# Altium PCB AICat V1.2.PcbDoc (part 1 of 2)
Units mil, origin at the board's own origin, x right, y up, seen from the top; angles counter-clockwise.
Board outline 6000 x 4000 mil, 2 copper layers (Top Layer, Bottom Layer); 86 components, 79 nets, 277 pads, 197 vias.
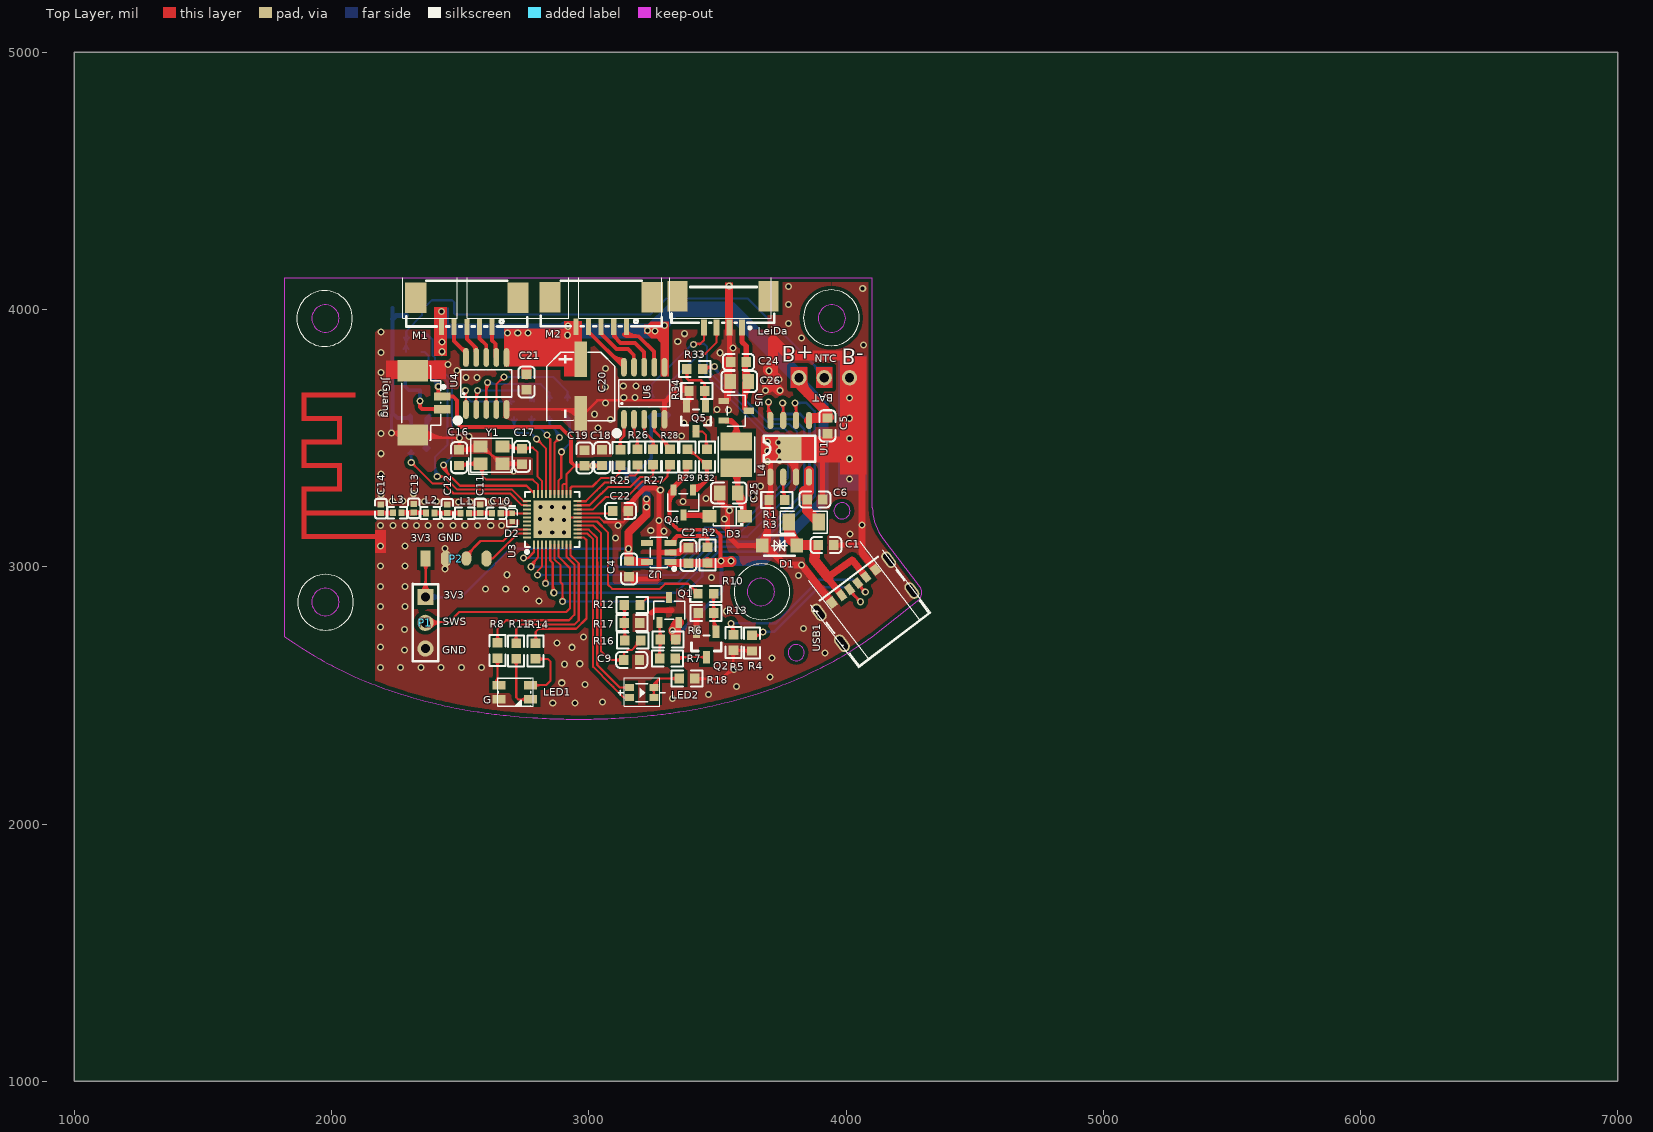
[diagram p0: Top Layer view]
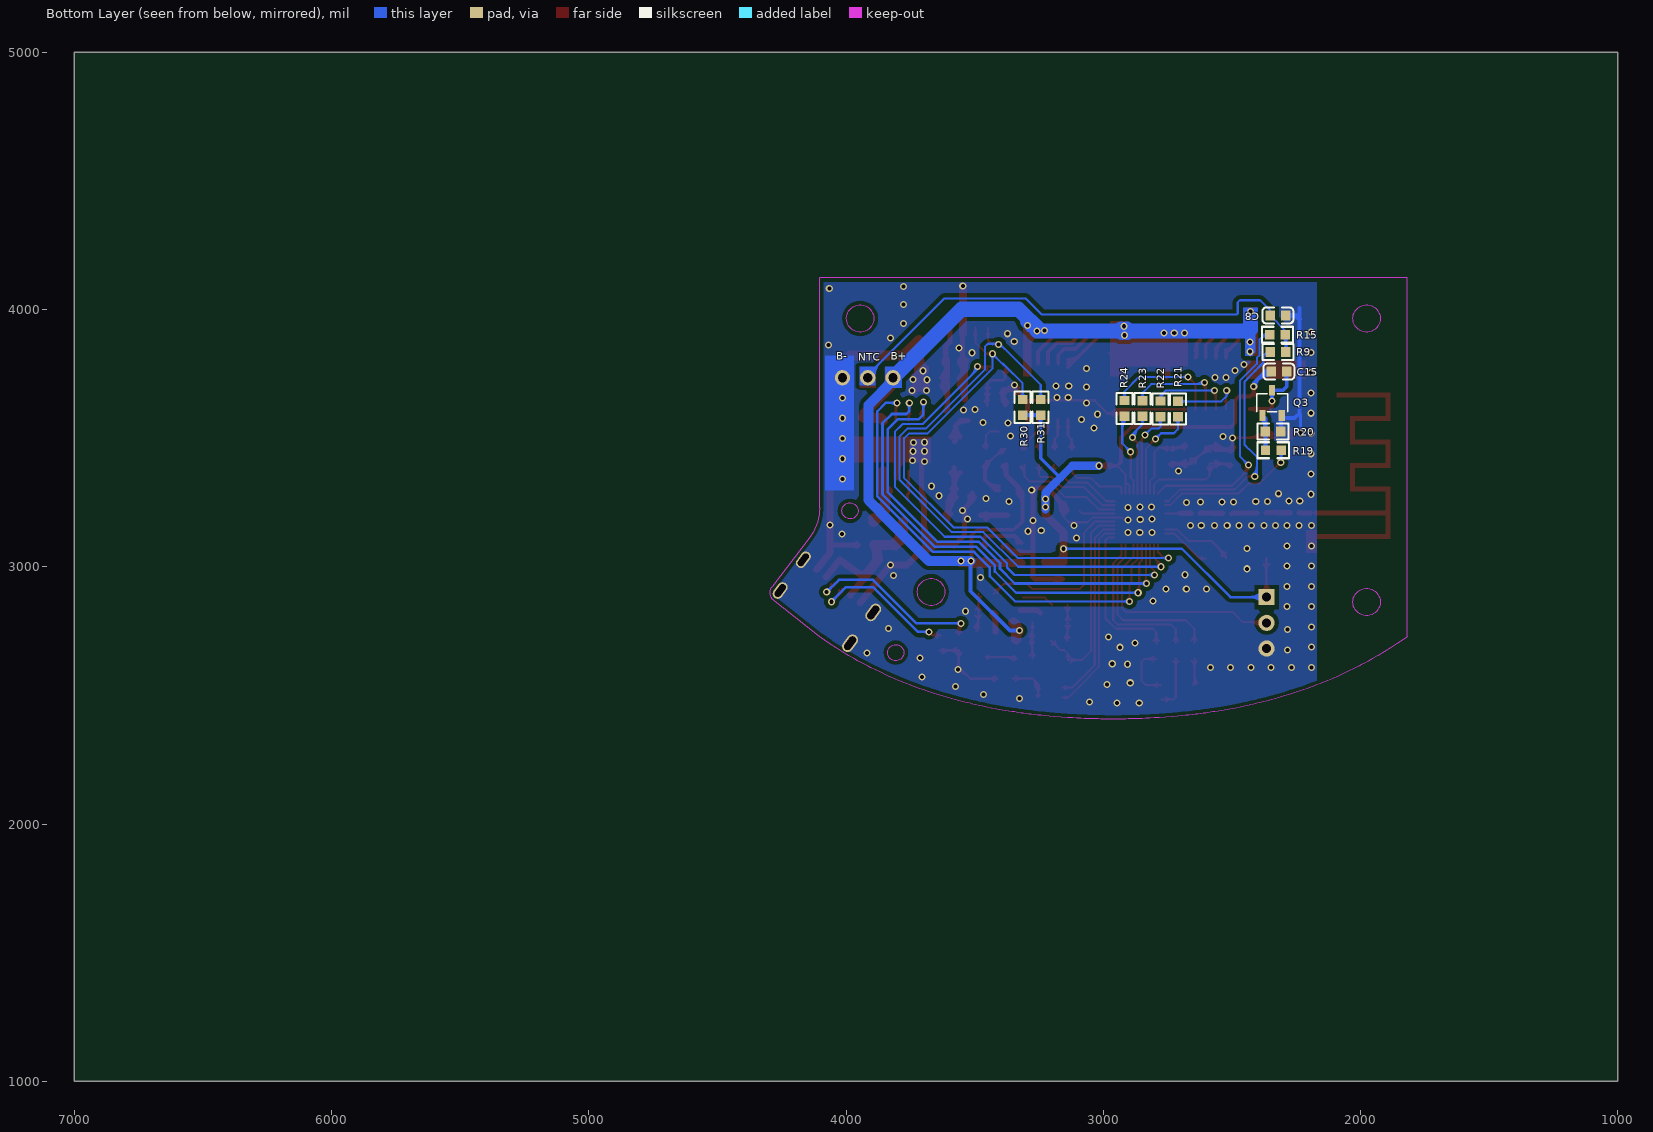
[diagram p1: Bottom Layer view, seen from below]
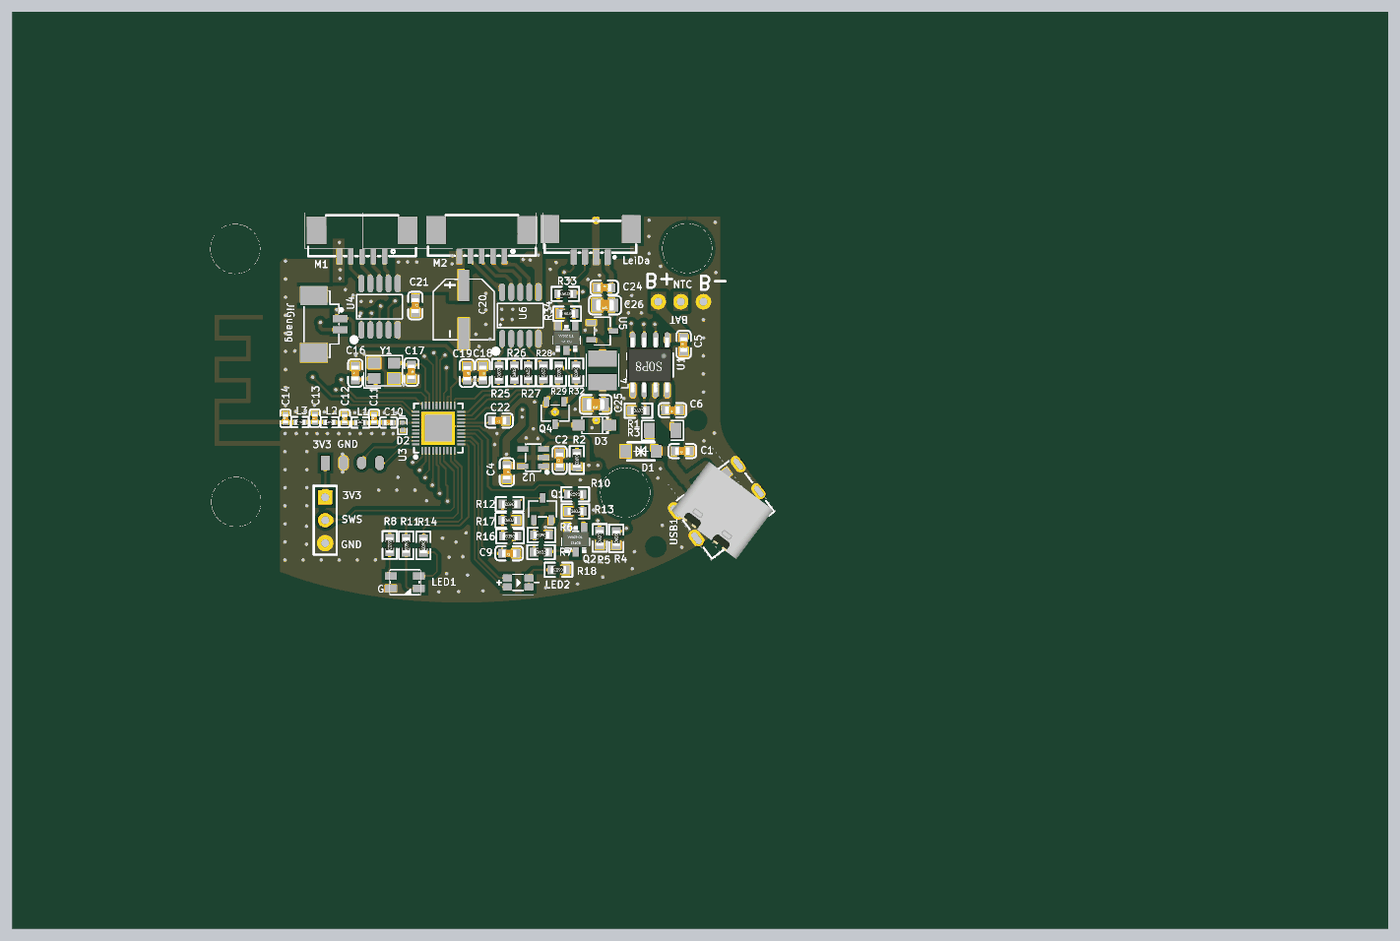
[diagram p3: 3D render of the assembled board from above, using the file's embedded part models]
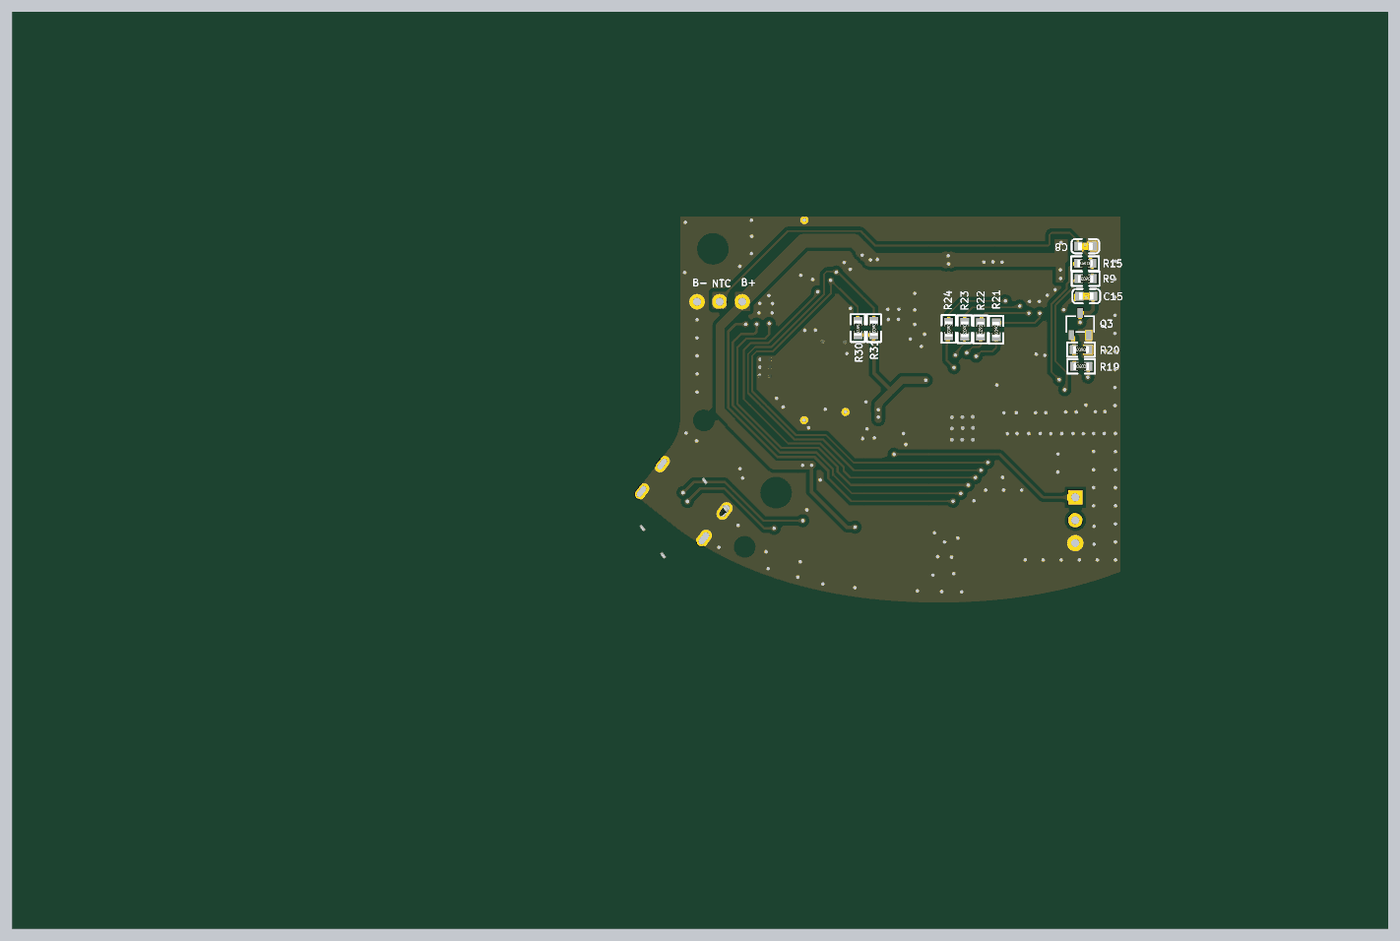
[diagram p4: 3D render of the assembled board from below, using the file's embedded part models]

## Layer stack, top to bottom
Top Layer: signal copper 1.4
Dielectric: dielectric 12.6, FR-4, Dk 4.8
Bottom Layer: signal copper 1.4

## Board outline
1000,1000 7000,1000 7000,5000 1000,5000

## Design rules (kind name [scope] priority, off if disabled: settings)
Clearance [All] p1: gap=7
ComponentClearance [All] p1: gap=0 collisioncheckmode=3 verticalgap=0 showdistances=FALSE
HoleToHoleClearance [All] p1: gap=4 allowstackedmicrovias=TRUE
MinimumSolderMaskSliver [All] p1: minsoldermaskwidth=2
PolygonConnect [All] p1: connectstyle=Direct reliefconductorwidth=10 reliefentries=4 polygonreliefangle="90 Angle"
RoutingVias [All] p1: holewidth=28 width=50 viastyle="Through Hole" minholewidth=28 minwidth=50 maxholewidth=28 maxwidth=50
SilkToSilkClearance [All] p1: silktosilkclearance=2
SilkscreenOverComponentPads [All] p1: minsilkscreentomaskgap=0
SolderMaskExpansion [All] p1: expansion=4
TestPointUsage [All] p1: valid=0 allowmultiple=FALSE
Testpoint [All] p1: side=15 testpointundercomponent=TRUE minsize=40 maxsize=100 preferedsize=60 minholesize=0 maxholesize=40 preferedholesize=32 testpointgrid=1 style=1023 order=0123456789
Width [All] p1: maxlimit=100 minlimit=8 preferedwidth=10 minimp=50.000000 maximp=50.000000 favimp=50.000000
19 further rules are at their usual default settings.

## Components (designator, comment, footprint, x,y, rotation, side; value= is the part's Value field where it differs from the comment)
BAT "BX-PH2.0-3PWT" HDR-TH_3P-P2.50_ZX-XH2.54-3PWZ 3943,3898 r180 top (schematic designator BAT1)
C1 "0.1uF" 0603_C 3922,3084 r180 top
C2 "1uf" 0603_C 3387,3044 r270 top
C4 "10uF" 0603_C 3157,2992 r90 top
C5 "10uf" 0603_C 3928,3548 r270 top
C6 "10UF" 0603_c 3879,3262 r180 top
C8 "100nF" 0603_C 2321,3977 r180 bottom
C9 "100nF" 0603_C 3167,2638 r180 top
C10 "220pF" 0402_c 2641,3208 r180 top
C11 "NC" 0402_C 2578,3226 r270 top
C12 "NC" 0402_C 2450,3225 r270 top
C13 "NC" 0402_C 2320,3227 r270 top
C14 "NC" 0402_C 2192,3226 r270 top
C15 "0.1uf/25v" 0603_C 2317,3759 r0 bottom
C16 "12PF" 0603_c 2496,3424 r270 top
C17 "12PF" 0603_c 2741,3429 r90 top
C18 "1UF" 0603_c 3052,3424 r90 top
C19 "1UF" 0603_c 2983,3423 r90 top
C20 "220uF/10V" "SMD 6.3*5.4 电解" 2968,3695 r270 top
C21 "100nf" 0603_C 2758,3718 r90 top
C22 "1UF" 0603_c 3123,3217 r180 top
C24 "0.1uF" 0603_C 3582,3796 r0 top
C25 "22uf-16v" 0805_c 3544,3287 r180 top
C26 "22uf-16v" 0805_c 3585,3720 r180 top
D1 "SMF5.0CA_C726939" "SOD-123 双向" 3748,3080 r0 top
D2 "SE6V3LHN102T 6.3v单向" 0402-D 2707,3189 r270 top
D3 "DSK24" SOD-123FL 3532,3190 r180 top
JiGuang "JiGuang" CONN-SMD_2P-P1.25-LT 2373,3637 r270 top (schematic designator CN1)
L1 "0R" 0402_R 2518,3208 r180 top
L2 "0R" 0402_R 2384,3209 r180 top
L3 "0R" 0402_R 2255,3210 r180 top
L4 "47uH" IND-SMD_L3.5-W3.0_CD31 3574,3436 r90 top
LED1 "XL-A3528RGBC-BM" LED-ARRAY-SMD_4P-L3.2-W2.8-LS3.5-BL_XL-A3528RGBC-BM 2712,2512 r0 top
LED2 "*" LED-SMD_4P-L3.2-W1.6-TL_XL-3216SURUGC 3206,2511 r0 top
LeiDa "HC-1.25-4PLT" CONN-SMD_4P-P1.25_LT 3522,3991 r180 top (schematic designator CN2)
M1 "MOTORA" CONN-SMD_1.25-5PLT 2526,3989 r180 top (schematic designator J1)
M2 "MOTORB" CONN-SMD_1.25-5PLT 3048,3990 r180 top (schematic designator J2)
P1 "DEBUG" SIP4-2.54#1 2365,2982 r270 top (schematic designator P2)
P2 "UART" SIP4-2.54#2 2366,3032 r0 top
Q1 "SI2301 P" SOT-23 3321,2811 r270 top
Q2 "S8050" SOT-23(SOT-23-3) 3457,2698 r90 top
Q3 "AO3400" SOT-23 2335,3617 r270 bottom
Q4 "SI2301 P" SOT-23 3359,3270 r90 top
Q5 "S8050" SOT-23(SOT-23-3) 3417,3576 r90 top
R1 "1.3k" 0603_R 3731,3260 r0 top
R2 "10k" 0603_R 3462,3045 r90 top
R3 "R250" 1206_R 3830,3172 r180 top
R4 "5.1K" 0603_R 3634,2703 r270 top
R5 "5.1K" 0603_R 3562,2705 r270 top
R6 "560K" 0603_R 3308,2718 r180 top
R7 "1K" 0603_R 3306,2643 r0 top
R8 "1k" 0603_R 2646,2674 r90 top
R9 "10k" 0603_R 2320,3835 r0 bottom
R10 "1K" 0603_r 3455,2895 r180 top
R11 "1k" 0603_R 2718,2673 r90 top
R12 "560K" 0603_R 3169,2852 r180 top
R13 "10K" 0603_r 3456,2821 r0 top
R14 "1k" 0603_R 2793,2672 r90 top
R15 "100R" 0603_R 2322,3902 r180 bottom
R16 "1K" 0603_R 3171,2713 r180 top
R17 "100K" 0603_R 3168,2782 r0 top
R18 "1K" 0603_R 3382,2566 r180 top
R19 "330R" 0603_R 2339,3453 r180 bottom
R20 "10K" 0603_R 2340,3526 r0 bottom
R21 "330R" 0603_R 2710,3613 r270 bottom
R22 "330R" 0603_R 2778,3614 r270 bottom
R23 "330R" 0603_R 2847,3615 r270 bottom
R24 "330R" 0603_R 2917,3616 r270 bottom
R25 "330R" 0603_R 3123,3425 r270 top
R26 "330R" 0603_R 3190,3426 r270 top
R27 "330R" 0603_R 3250,3427 r270 top
R28 "330R" 0603_R 3316,3427 r270 top
R29 "560K" 0603_R 3384,3427 r90 top
R30 "10K" 0603_R 3313,3620 r270 bottom
R31 "10K" 0603_R 3243,3620 r270 bottom
R32 "1K" 0603_R 3459,3427 r90 top
R33 "1K" 0603_r 3412,3769 r0 top
R34 "10K" 0603_r 3420,3683 r0 top
U1 "TP4056X" SOP8-9 3781,3459 r0 top
U2 "SSP7615" SOT-23-5 3265,3038 r180 top
U3 "TLSR8208C" QFN-40_L5.0-W5.0-P0.40-BL-EP3.7 2860,3181 r0 top
U4 "ULN2802" ESSOP-10 2607,3705 r0 top
U5 "HE9116A50NR" SOT-23 3553,3598 r180 top
U6 "ULN2802" ESSOP-10 3221,3667 r0 top
USB1 "TYPE-C 6P" TPYE-C-6 4075,2865 r127 top
Y1 "24MHz +-20PPM" CRYSTAL-SMD_4P-L3.2-W2.5 2633,3432 r0 top

## Footprints (in the part's own frame and the unit in brackets; to place one, negate y for a bottom-side part, rotate by r counter-clockwise, add the part's x,y. Pads: shape width x height; smd on the part's side, far side on the other; paste and mask are expansions set on the pad)
0402-D [mil]
  rect 19.89x21.68 smd paste-3937.01 mask+2: 1(-19.05,-5.15) 2(13.75,-5.15)
  silkscreen extent -50,-25 33,15
0402_c [mm]
  rect 0.6x0.65 smd: 1(-0.425,0) 2(0.425,0)
  silkscreen extent -0.98,-0.58 0.98,0.58, body extent -0.48,-0.3 0.52,0.3, height 0.2
0402_C [mm]
  rect 0.6x0.65 smd: 1(-0.425,0) 2(0.425,0)
  silkscreen extent -0.98,-0.58 0.98,0.58, body extent -0.48,-0.3 0.52,0.3, height 0.2
0402_R [mm]
  rect 0.6x0.65 smd: 1(-0.425,0) 2(0.425,0)
  silkscreen extent -0.97,-0.58 0.97,0.58, body extent -0.57,-0.27 0.58,0.28, height 0.41
0603_C [mm]
  rect 0.93x0.98 smd: 1(-0.77,0) 2(0.77,0)
  silkscreen extent -1.54,-0.79 1.54,0.79, body extent -0.8,-0.4 0.8,0.4, height 0.3
0603_c [mm]
  rect 0.93x0.98 smd: 1(-0.77,0) 2(0.77,0)
  silkscreen extent -1.54,-0.79 1.54,0.79, body extent -0.8,-0.4 0.8,0.4, height 0.3
0603_R [mm]
  rect 0.93x0.98 smd: 1(-0.77,0) 2(0.77,0)
  silkscreen extent -1.53,-0.79 1.54,0.79, body extent -0.85,-0.4 0.85,0.4, height 0.56
0603_r [mm]
  rect 0.93x0.98 smd: 1(-0.77,0) 2(0.77,0)
  silkscreen extent -1.53,-0.79 1.54,0.79, body extent -0.85,-0.4 0.85,0.4, height 0.56
0805_c [mm]
  rect 1.16x1.47 smd: 1(-0.89,0) 2(0.89,0)
  silkscreen extent -1.77,-1.04 1.77,1.04, body extent -1,-0.62 1,0.63, height 0.77
1206_R [mil]
  rect 47.54x66.97 smd: 1(-64.23,-1.52) 2(52.21,-1.52)
  silkscreen extent -97,-44 85,41
CONN-SMD_1.25-5PLT [mm]
  rect 0.5x1.6 smd paste+0.051: 1(-2.5,1.45) 2(-1.25,1.45) 3(0,1.45) 4(1.25,1.45) 5(2.5,1.45)
  rect 2.1x3 smd paste+0.051: 6(-5.05,-1.45) 7(5.05,-1.45)
  silkscreen extent -5.97,-3.12 5.97,1.4
CONN-SMD_2P-P1.25-LT [mm]
  rect 0.8x1.6 smd paste+0 mask+0.05: 1(-0.625,1.45) 2(0.625,1.45)
  rect 2.1x3 smd paste+0 mask+0.05: 3(-3.175,-1.45) 4(3.175,-1.45)
  silkscreen extent -3.68,-2.55 3.68,1.73
CONN-SMD_4P-P1.25_LT [mm]
  rect 0.6x1.6 smd paste+0.051: 1(-1.875,1.55) 2(-0.625,1.55) 3(0.625,1.55) 4(1.875,1.55)
  rect 2x3 smd paste+0.051: 5(-4.5,-1.55) 6(4.5,-1.55)
  silkscreen extent -5.06,-2.45 5.09,1.7
CRYSTAL-SMD_4P-L3.2-W2.5 [mm]
  rect 1.4x1.2 smd: 1(-1.383,-0.797) 2(0.817,-0.797) 3(0.817,0.903) 4(-1.383,0.903)
  silkscreen extent -2.54,-1.85 1.75,1.73
ESSOP-10 [mm]
  oval 0.56x1.855 smd paste+0.051: 1(-2.141,-2.375) 2(-1.141,-2.375) 3(-0.141,-2.375) 4(0.859,-2.375) 5(1.859,-2.375) 6(1.859,2.765) 7(0.859,2.765) 8(-0.141,2.765) 9(-1.141,2.765) 10(-2.141,2.765)
  silkscreen extent -2.67,-1.14 2.39,1.53
HDR-TH_3P-P2.50_ZX-XH2.54-3PWZ [mm]
  round 1.5 hole 0.9: 1(-1.801,4.145) 2(0.699,4.145) 3(3.199,4.145)
IND-SMD_L3.5-W3.0_CD31 [mm]
  rect 1.8x3.12 smd: 1(-1.303,0) 2(1.303,0)
  silkscreen extent -1.75,-1.8 1.75,1.8
LED-ARRAY-SMD_4P-L3.2-W2.8-LS3.5-BL_XL-A3528RGBC-BM [mm]
  rect 1.3x0.82 smd paste+0 mask+0.05: 1(-1.55,-0.7) 2(-1.55,0.7) 3(1.55,-0.7) 4(1.55,0.7)
  silkscreen extent -1.6,-1.4 1.6,1.4
LED-SMD_4P-L3.2-W1.6-TL_XL-3216SURUGC [mm]
  rect 0.9x0.7 smd paste+0.051: 1(-1.2,0.5) 2(1.2,0.5) 3(-1.2,-0.5) 4(1.2,-0.5)
  silkscreen extent -2.33,-0.89 2.3,0.89
QFN-40_L5.0-W5.0-P0.40-BL-EP3.7 [mm]
  rect 0.2x0.8 smd paste-100 mask+0.05: 1(-1.847,-2.425) 2(-1.447,-2.425) 3(-1.047,-2.425) 4(-0.647,-2.425) 5(-0.247,-2.425) 6(0.153,-2.425) 7(0.553,-2.425) 8(0.953,-2.425) 9(1.353,-2.425) 10(1.753,-2.425) 21(1.753,2.573) 22(1.353,2.573) 23(0.953,2.573) 24(0.553,2.573) 25(0.153,2.573) 26(-0.247,2.573) 27(-0.647,2.573) 28(-1.047,2.573) 29(-1.447,2.573) 30(-1.847,2.573)
  rect 0.8x0.2 smd paste-100 mask+0.05: 11(2.452,-1.726) 12(2.452,-1.326) 13(2.452,-0.926) 14(2.452,-0.526) 15(2.452,-0.126) 16(2.452,0.274) 17(2.452,0.674) 18(2.452,1.074) 19(2.452,1.474) 20(2.452,1.874) 31(-2.546,1.874) 32(-2.546,1.474) 33(-2.546,1.074) 34(-2.546,0.674) 35(-2.546,0.274) 36(-2.546,-0.126) 37(-2.546,-0.526) 38(-2.546,-0.926) 39(-2.546,-1.326) 40(-2.546,-1.726)
  rect 3.7x3.7 smd paste-100 mask+0.05: 41(-0.047,0.074)
  silkscreen extent -2.75,-3.28 2.65,2.77
SIP4-2.54#1 [mm]
  rect 1.6x1.6 hole 0.9: 2(2.54,0)
  round 1.6 hole 0.9: 3(5.08,0) 4(7.62,0)
  silkscreen extent 1.24,-1.27 8.89,1.27
SIP4-2.54#2 [mm]
  rect 1x1.6 smd: 1(0,0)
  oval 1x1.6 smd: 2(2,0) 4(6,0)
  oval 1x1.4 smd: 3(4,0)
"SMD 6.3*5.4 电解" [mm]
  rect 3.5x1.2 smd: 1(-2.822,0.023) 2(2.518,0.023)
  silkscreen extent -3.53,-3.35 3.22,3.4
"SOD-123 双向" [mm]
  rect 1.2x1.4 smd: 1(-1.864,0.06) 2(1.536,0.06)
  silkscreen extent -1.66,-0.94 1.34,1.06
SOD-123FL [mm]
  rect 1.4x1.2 smd: 1(1.579,-0.166) 2(-1.891,-0.166)
  silkscreen extent -1.76,-1.17 1.22,0.84
SOP8-9 [mil]
  oval 24x66.93 smd: 1(-75,-110) 2(-25,-110) 3(25,-110) 4(75,-110) 5(75,110) 6(25,110) 7(-25,110) 8(-75,110)
  rect 90.55x90.55 smd: 9(0,0)
  silkscreen extent -100,-50 100,50, body extent -100,-119 98,119, height 63
SOT-23 [mm]
  rect 1.07x0.6 smd: 1(0.719,-1.166) 2(0.719,0.734) 3(-1.751,-0.216)
  silkscreen extent -1.39,-1.75 0.36,1.32
SOT-23(SOT-23-3) [mm]
  rect 1.25x0.7 smd: 1(1.25,-0.95) 2(1.25,0.95) 3(-1.25,0)
  silkscreen extent -0.65,-1.46 0.9,1.46, body extent -1.5,-1.5 1.5,1.5, height 1.3
SOT-23-5 [mm]
  rect 1.2x0.6 smd paste+0 mask+0.05: 1(-1.325,0.51) 2(-1.325,-0.44) 3(-1.325,-1.39) 4(0.975,-1.39) 5(0.975,0.51)
  silkscreen extent -1.85,-1.94 0.67,1.32
TPYE-C-6 [mm]
  oval 1.9x1.1 hole 0.7 slot 1.5 at 0 deg: 7(-1.9,4.32) 7(1.9,4.32)
  oval 1.8x1 hole 0.6 slot 1.4 at 0 deg: 7(-1.9,-4.32) 7(1.9,-4.32)
  rect 1x0.7 smd: A5(1.9,0.5) A9(1.9,-1.5) B5(1.9,-0.5) B9(1.9,1.5)
  rect 1x0.8 smd: A12(1.9,-2.7) B12(1.9,2.7)
  silkscreen extent -4.7,-4.32 2.79,4.65, body extent -4.55,-4.45 2.25,4.49, height 3.41

## Part data
C1 C4 C5 C15 C24: library part Cap, "Capacitor"
C2 C21 C25 C26: library part Cap1, "无极电容"
C6 C8 C9 C18 C19 C22: library part CAP
C10 C11 C12 C13 C14 C16 C17: library part CAP, "Capacitor"
C20: library part RVT1A221M0605_C72494
D2: library part TPNSR05F20NXT5G
D3: library part "Diode 1N4148", "High Conductance Fast Diode"
JiGuang: library part HC-1.25-2PLT
L1 L2 L3: library part INDUCTOR
L4: library part "CD31-470M 47UH"
LED2: library part TJ-S2012SW8TCGLC2R2G-A5
M1 M2: library part HC-1.25-5PLT
P1 P2: library part "Header 4", "Header, 4-Pin"
Q1 Q3 Q4: library part JMTL3400A
Q2 Q5: library part NPN_sot23, "NPN三极管"
R1 R3 R4 R5 R6 R7 R8 R11 R12 R14 R16 R17 R18 R20 R29 R30 R31 R32: library part RES
R2 R9 R10 R13 R15 R19 R21 R22 R23 R24 R25 R26 R27 R28 R33 R34: library part Res2, "Resistor"
U1: library part TP4056, "TP4056"
U2: library part SSP7615-33M5R
U4 U6: library part ULN2802_C2828555
USB1: library part "TYPE-C 6P LTH6.5"
Y1: library part TAXM13.56M4RLBCCT2T

## Via types
v1: diameter 27.56, hole 15.75, Top Layer to Bottom Layer, tented both sides, 194 vias
v2: diameter 27.56, hole 15.75, Top Layer to Bottom Layer, 3 vias

## Nets (pads, with @x,y where several pads share a name; then routed paths per layer and width w, separated by ;. In a path a pad name is that pad's centre, name@x,y a point inside that pad or via, vN(x,y) a via of type N, cw(c..) or ccw(c..) an arc to the next point about the centre after c; other vN are vias at no path point)
3V3: C4.2 C15.2 C18.1 C19.1 JiGuang.1 P1.2 P2.1 R30.2 R31.2 U2.5 U3.22 U3.23 | length 4292.9
  Top Layer w8: U3.23@2897.52,3282.31 2897.52,3317.52 2902,3322 2913.27,3322 ; U3.22@2913.27,3282.31 2913.27,3322 ; 2946,3392.68 2913.27,3359.95 2913.27,3322
  Top Layer w10: P1.2@2346.26,2900.74 ccw(c2298.62,2948.38) 2366,2948.38 ; P1.2@2353.34,2893.66 ccw(c2322.76,2924.24) 2366,2924.24 ; P2.1@2355.62,3009.81 cw(c2330.55,2984.74) 2366,2984.74 cw(c2401.45,2984.74) P2.1@2376.38,3009.81 ; P1.2@2365,2882 2366,2883 P2.1@2366,3032 ; 2366,2919.41 ccw(c2402.41,2919.41) P1.2@2376.66,2893.66 ; 2366,2943.55 ccw(c2426.55,2943.55) P1.2@2383.74,2900.74
  Top Layer w15: JiGuang.1@2408.5,3667.44 ccw(c2392.82,3683.12) 2415,3683.12 ; v1@2410.56,3695.56 cw(c2399.84,3684.84) 2415,3684.84 cw(c2430.16,3684.84) v1@2419.44,3695.56 ; 2415,3679.92 ccw(c2432.65,3679.92) JiGuang.1@2420.17,3667.44 ; v1(2415,3700) 2415,3676.69 JiGuang.1@2430.09,3661.61 2473.39,3661.61 2488,3647 2488,3560 2504,3544 2889.24,3544 2931,3502.24 2931,3407 2945.32,3392.68 ; JiGuang.1@2451.67,3655.77 cw(c2465.75,3641.69) 2465.75,3661.61 cw(c2465.75,3681.52) JiGuang.1@2451.67,3667.44 ; 2946,3392.68 C19.1@2983,3392.68 v1(3017,3392.68) C18.1@3051,3392.68 ; C19.1@2974.37,3385.04 ccw(c2955.93,3366.59) 2955.93,3392.68 ccw(c2955.93,3418.77) C19.1@2974.37,3400.33 ; C19.1@2991.63,3385.04 cw(c3010.07,3366.59) 3010.07,3392.68 cw(c3010.07,3418.77) C19.1@2991.63,3400.33 ; v1@3012.56,3388.24 ccw(c3001.84,3377.52) 3001.84,3392.68 ccw(c3001.84,3407.84) v1@3012.56,3397.12 ; v1@3021.44,3388.24 cw(c3032.16,3377.52) 3032.16,3392.68 cw(c3032.16,3407.84) v1@3021.44,3397.12 ; v1@3022.51,3392.68 ccw(c3022.51,3422.19) C18.1@3043.37,3401.33 ; v1@3027.34,3392.68 cw(c3027.34,3370.01) C18.1@3043.37,3386.04
  Top Layer w31.5: C4.2@3155,3018.96 3225.59,3018.96 U2.5@3226.62,3017.93 ; C4.2@3155,3022.04 v1(3155,3070) 3155,3133 3223.69,3201.69 v1@3223.69,3261 ; 3155,3046.39 ccw(c3182.35,3046.39) C4.2@3163.01,3027.05 ; C4.2@3169.11,3027.05 ccw(c3188.65,3046.58) 3188.65,3018.96
  Bottom Layer w10: P1.2@2365,2882 2506,2882 2694,3070 v1(3155,3070) ; P1.2@2376.66,2870.34 cw(c2404.82,2842.18) 2404.82,2882 cw(c2404.82,2921.82) P1.2@2376.66,2893.66 ; P1.2@2383.74,2863.26 cw(c2428.97,2818.03) 2428.97,2882 cw(c2428.97,2945.97) P1.2@2383.74,2900.74 ; v1@3148.79,3063.79 ccw(c3133.8,3048.8) 3133.8,3070 ccw(c3133.8,3091.2) v1@3148.79,3076.21
  Bottom Layer w15: C15.2@2344.83,3761.4 cw(c2356.06,3746.1) 2369.48,3759.52 ; C15.2@2347.31,3747.21 cw(c2347.31,3663.97) 2406.17,3722.83 ; C15.2@2347.31,3759 2370,3759 ; C15.2@2347.31,3762.21 cw(c2347.31,3715.19) 2380.56,3748.44 ; C15.2@2353.71,3749.31 cw(c2366.53,3731.86) 2381.83,3747.17 ; C15.2@2355.71,3752.19 cw(c2370,3740.59) 2370,3759 ; C15.2@2355.71,3765.81 ccw(c2370,3777.41) 2370,3759 ; 2394.38,3734.62 cw(c2359.76,3700) v1@2408.72,3700 ; v1(2415,3700) 2415,3714 2370,3759 ; 3180,3333 3167,3346 3243,3422 R31.2@3243,3589.68 R30.2@3313,3589.68 ; R31.2@3235.36,3582.04 cw(c3216.91,3563.59) 3243,3563.59 cw(c3269.09,3563.59) R31.2@3250.64,3582.04 ; R31.2@3251.63,3582.04 cw(c3270.07,3563.59) 3270.07,3589.68 cw(c3270.07,3615.77) R31.2@3251.63,3597.33 ; R30.2@3304.37,3582.04 ccw(c3285.93,3563.59) 3285.93,3589.68 ccw(c3285.93,3615.77) R30.2@3304.37,3597.33
  Bottom Layer w31.5: v1(3017,3392.68) 3120.32,3392.68 3167,3346 ; 3180,3333 3224,3289 v1(3224,3264) v1(3224,3232) v1@3224,3222 ; 3209.68,3303.32 cw(c3170.37,3264) v1@3225.97,3264
+5V: C24.2 C26.1 LeiDa.1 U5.3 | length 550.1
  Top Layer w20: LeiDa.1@3595.82,3929.98 3595.82,3874.18 3612.31,3857.69 C24.2@3612.31,3796 ; U5.3@3606,3615.42 C26.1@3606,3717 ; 3606,3627.03 ccw(c3633.2,3627.03) U5.3@3613.97,3607.8 ; 3606,3649.02 cw(c3684.92,3649.02) C26.1@3629.12,3704.82 ; 3606.04,3759.81 cw(c3647.52,3759.81) C24.2@3618.19,3789.14 ; C24.2@3606.04,3790.89 ccw(c3684.82,3790.89) C26.1@3629.12,3735.18 ; C24.2@3606.44,3802.86 ccw(c3592.26,3817.04) 3612.31,3817.04 ccw(c3632.37,3817.04) C24.2@3618.19,3802.86 ; C24.2@3618,3796 C24.2@3612.31,3796 ; C26.1@3621.94,3716.1 3606.04,3732 3606.04,3796 C24.2@3612.31,3796
AD_BAT: C9.2 R16.1 U3.14 | length 909.4
  Top Layer w8: U3.14@2956.55,3160.29 3017.71,3160.29 3048,3130 3048,2671 3081,2638 C9.2@3136.69,2638 3136.69,2661.69 ; C9.2@3126.57,2627.88 ccw(c3102.15,2603.46) 3102.15,2638 ccw(c3102.15,2672.54) C9.2@3126.57,2648.12 ; C9.2@3130.51,2651.89 ccw(c3125.83,2661.69) 3136.69,2661.69 ; C9.2@3142.86,2651.89 cw(c3147.54,2661.69) 3136.69,2661.69 ; 3175.69,2684.69 ccw(c3148.36,2712.02) R16.1@3187.01,2712.02 ; 3179.8,2688.8 cw(c3201.31,2667.28) R16.1@3201.31,2697.71 ; R16.1@3201.31,2713 3201.31,2710.31 3167,2676 3151,2676 3136.69,2661.69
AD_NTC: R15.1 U3.30 | length 1227.1
  Top Layer w8: v1@2428.78,3395 ccw(c2451.29,3395) 2435.37,3379.08 ; v1(2435,3395) 2435,3379.46 2499.46,3315 2758,3315 2787.28,3285.72 U3.30@2787.28,3282.31 ; v1@2436.78,3395 ccw(c2478.6,3395) 2449.03,3365.43 ; v1@2444.78,3395 ccw(c2505.92,3395) 2462.69,3351.77
  Bottom Layer w8: R15.1@2350.33,3910.5 cw(c2355.18,3887.3) 2371.94,3904.06 ; R15.1@2351.97,3902.67 cw(c2358.79,3869.98) 2382.4,3893.6 ; R15.1@2352.31,3902 2374,3902 2392,3884 2392,3823 2403,3812 2403,3789.21 2469,3723.21 2469,3429 v1(2435,3395) ; R15.1@2353.6,3894.84 cw(c2362.4,3852.67) 2392.87,3883.13 ; v1@2435,3404.78 ccw(c2435,3428.39) 2451.69,3411.69 ccw(c2468.39,3395) v1@2444.78,3395
BAT+: BAT.3 C2.2 C5.1 C20.1 C21.2 M1.5 M2.5 Q1.2 Q4.2 R2.1 R6.1 R29.1 U1.5 U2.1 U4.6 U6.6 | length 5260.6
  Top Layer w8: 2424.58,3888.91 cw(c2448.92,3888.91) M1.5@2431.71,3906.13 ; 2424.57,3891.39 ccw(c2447.39,3891.39) v1@2431.26,3875.26 ; M1.5@2424.58,3910.71 ccw(c2466.71,3910.71) v1@2436.92,3880.92 ; M1.5@2424.57,3924.91 2424.57,3862.43 v1@2426,3861 ; C21.2@2745.76,3748.31 C21.2@2758,3748.31 ; 2886,3848 2888,3848 2940.9,3795.1 C20.1@2976.57,3830.78 ; 2939.48,3793.68 cw(c2952.71,3780.45) C20.1@2962.7,3796.27
  Top Layer w15: v1@3227,3928 3244,3945 ; v1@3229,3912 3246,3895 ; 3266,3895 3283,3878 ; 3314,3239.74 cw(c3379.44,3239.74) Q4.2@3333.17,3286.01 ; 3314,3268.43 cw(c3330.31,3268.43) Q4.2@3330.16,3284.74 ; 3314,3275.95 cw(c3343.22,3275.95) Q4.2@3322.56,3296.61 ; 3314,3283.57 cw(c3330.17,3283.57) Q4.2@3330.02,3299.74 ; 3317.21,3279.4 cw(c3330.12,3266.49) Q4.2@3330.12,3284.74 ; Q4.2@3335.12,3297.31 3314,3276.19 3314,3176 3336,3154 3338,3154 3348,3144 3490,3144 3511.5,3122.5 3511.5,3024.19 v1(3514,3021.69) ; 3511.5,3042.88 ccw(c3535.2,3042.88) v1@3518.44,3026.13
  Top Layer w20: Q4.2@3325.12,3277.31 3325.12,3304.12 3378,3357 R29.1@3378,3397.69 ; 3378,3364.52 cw(c3415.18,3364.52) R29.1@3388.89,3390.81
  Top Layer w31.5: U2.1@3317.17,3014.93 R2.1@3458.24,3014.93 ; R2.1@3458.24,3017.93 R2.1@3462,3021.69
  Top Layer w39.37: 2757,3796 2758,3795 C21.2@2758,3748.31 ; v1@3329.18,2747.82 ccw(c3307.11,2769.89) Q1.2@3338.31,2769.89 ; v1@3329.18,2756.18 cw(c3307.11,2734.11) R6.1@3338.31,2734.11 ; R6.1@3338.31,2718 3338.31,2771.12 Q1.2@3349.88,2782.69 ; Q1.2@3338.31,2764.52 cw(c3358.8,2764.52) Q1.2@3344.31,2779.01 ; R2.1@3462,3014.69 v1@3514,3014.69 ; v1@3514,3018.69 v1@3553.69,3018.69 ; v1(3553.69,3021.69) v1@3554,3022 ; BAT.3@3811.3,3726.82 cw(c3792.05,3700.08) 3825,3700.08 ; BAT.3@3817.05,3734.81 3825,3726.86 3825,3701 3928,3598 C5.1@3928,3581.32 ; BAT.3@3826.89,3734.81 ccw(c3913.07,3734.81) 3852.13,3673.87 ; U1.5@3856,3569 3865.32,3578.32 C5.1@3928,3578.32 C5.1@3928,3581.32 ; 3896.32,3581.32 C5.1@3928,3581.32 ; 3914.75,3611.25 cw(c3881.82,3578.32) C5.1@3928.39,3578.32 ; C5.1@3933.68,3581.32 C5.1@3928,3581.32
  Bottom Layer w8: 2412,3837 2427,3822
  Bottom Layer w10: 2404,3915 2428,3891 ; 2404.41,3914.59 cw(c2363.81,3874) v1@2421.22,3874 ; 2421.48,3897.52 cw(c2397.95,3874) v1@2431.22,3874
  Bottom Layer w15: v1(3325,2752) 3363,2752 3516,2905 v1@3516,3023 ; v1@3329.44,2747.56 cw(c3340.16,2736.84) 3340.16,2752 cw(c3340.16,2767.16) v1@3329.44,2756.44 ; v1@3509.56,3017.25 cw(c3494.01,3001.7) 3516,3001.7
  Bottom Layer w39.37: v1@3516,3023 3678,3023 3865,3210 3865,3211.38 3912.69,3259.06 3912.69,3628 3820,3720.69 3820,3731.86 BAT.3@3817.05,3734.81 ; BAT.3@3826.89,3734.81 ccw(c3877.62,3734.81) 3841.75,3698.94
  Bottom Layer w59.06: 2442.29,3917 2764,3917 2919,3917 v1(3258,3917) ; 2906.86,3911.14 cw(c2921.02,3896.98) 2921.02,3917 ; 2907.86,3923.86 ccw(c2924.44,3940.44) 2924.44,3917 ; 2913.56,3917 ccw(c2913.56,3940.44) 2930.14,3923.86 ; 2914.98,3917 cw(c2914.98,3896.98) 2929.14,3911.14 ; v1@3246.5,3918.5 3329,4001 3550.86,4001 BAT.3@3817.05,3734.81 ; 3273.08,3945.08 cw(c3294,3924.17) 3294,3953.75 ; 3278.25,3938 cw(c3307.83,3938) 3286.92,3958.92
  other v1: 2429,3836 2430,3874 2918,3900 2684,3908 2764,3908 2724,3909 3228,3919 2919,3935 3294,3938 2427,3993
CC1: R4.1 USB1.A5 | length 761.4
  Top Layer w10: R4.1@3634,2733.31 3664.31,2733.31 ; R4.1@3645,2724.55 cw(c3664.31,2707.65) 3664.31,2733.31 ; R4.1@3645,2742.08 ccw(c3664.31,2758.98) 3664.31,2733.31 ; v1(3678,2747) 3664.31,2733.31 ; USB1.A5@4014.26,2912.89 4014.26,2905.74 v1(4056,2864) ; USB1.A5@4026.59,2908.17 ccw(c4062.24,2908.17) 4037.03,2882.97 ; v1@4047.22,2864 ccw(c4026.02,2864) 4041.01,2878.99 ccw(c4056,2893.98) v1@4056,2872.78
  Bottom Layer w10: v1(3678,2747) 3721,2747 3895,2921 4000,2921 v1@4056.5,2864.5 ; v1@3684.21,2740.79 cw(c3699.2,2725.8) 3699.2,2747 cw(c3699.2,2768.2) v1@3684.21,2753.21 ; 4040.31,2880.69 cw(c4023.61,2864) v1@4047.22,2864 ; 4042.72,2878.28 ccw(c4056,2891.56) v1@4056,2872.78
CC2: R5.1 USB1.B5 | length 952.8
  Top Layer w10: v1@3546.79,2773.79 cw(c3510.08,2737.08) R5.1@3562,2737.08 ; R5.1@3552.59,2744.72 ccw(c3529.87,2767.44) 3562,2767.44 ccw(c3594.13,2767.44) R5.1@3571.41,2744.72 ; v1(3553,2780) 3562,2771 R5.1@3562,2735.31 ; v1@3553.86,2780.86 cw(c3534.22,2761.22) 3562,2761.22 ; USB1.B5@4045.7,2936.58 4045.7,2931.3 v1(4075,2902) ; USB1.B5@4049.26,2923.09 cw(c4049.26,2911.84) 4057.21,2919.79 ; USB1.B5@4058.03,2931.87 ccw(c4089.18,2931.87) v1@4067.16,2909.84 ; v1@4066.22,2902 ccw(c4045.02,2902) 4060.01,2916.99 ccw(c4075,2931.98) v1@4075,2910.78
  Bottom Layer w10: v1(3553,2780) 3725.72,2780 3894.72,2949 4028,2949 v1(4075,2902) ; v1@3559.21,2773.79 cw(c3574.2,2758.8) 3574.2,2780 cw(c3574.2,2801.2) v1@3559.21,2786.21 ; v1@4066.22,2902 ccw(c4045.02,2902) 4060.01,2916.99 ccw(c4075,2931.98) v1@4075,2910.78
CHAR_G: LED2.3 U3.12 | length 790.6
  Top Layer w8: U3.12@2956.55,3128.79 2994.99,3128.79 3017,3106.79 3017,2611 3088,2540 ; 3095.32,2532.68 3088,2540 ; LED2.3@3146.65,2485.94 ccw(c3136.69,2479.39) 3136.69,2491.32 ; LED2.3@3146.65,2496.69 cw(c3136.69,2503.24) 3136.69,2491.32 ; LED2.3@3158.76,2491.32 3136.68,2491.32 ; 3088,2540 3136.68,2491.32
CHARG_EN: U1.8 U3.4 | length 2041.5
  Top Layer w8: v1@2825.08,2941.92 ccw(c2802.29,2964.71) 2834.53,2964.71 ; v1(2832,2935) 2834.53,2937.53 U3.4@2834.53,3085.51 ; 2834.53,2952.51 ccw(c2849.51,2952.51) v1@2838.92,2941.92
  Top Layer w10: v1@3692.79,3633.79 cw(c3680.22,3621.22) 3698,3621.22 ; 3696.23,3603.77 cw(c3687.92,3595.45) U1.8@3699.25,3592.33 ; U1.8@3698,3579 v1@3698,3635 ; 3698,3602 3706,3594 U1.8@3706,3592 ; 3698,3602.54 ccw(c3718.07,3602.54) U1.8@3703.88,3588.34 ; 3698,3616.39 cw(c3722.61,3616.39) v1@3705.21,3633.79 ; v1@3698,3626.68 ccw(c3742.21,3626.68) U1.8@3710.95,3595.41
  Bottom Layer w10: v1(2832,2935) 3344,2935 3401.4,2992.4 3401.4,3014.02 3485.06,3097.68 3645.68,3097.68 3838,3290 3838,3534 3798,3574 3717,3574 3699,3592 v1(3699,3640) ; v1@2838.21,2928.79 cw(c2853.2,2913.8) 2853.2,2935 cw(c2853.2,2956.2) v1@2838.21,2941.21 ; v1@3692.79,3633.79 cw(c3677.8,3618.8) 3699,3618.8 cw(c3720.2,3618.8) v1@3705.21,3633.79
CHARG_STY: U1.6 U3.6 | length 2053.9
  Top Layer w8: U3.6@2866.02,3085.51 2866.02,3029.98 2890.78,3005.22 2890.78,2938.78 2898,2931.56 v1(2898,2865) ; v1@2891.08,2871.92 ccw(c2874.39,2888.61) 2898,2888.61 ccw(c2921.61,2888.61) v1@2904.92,2871.92
  Top Layer w10: v1@3795.79,3630.79 cw(c3771.15,3606.15) 3806,3606.15 ; U1.6@3801.05,3595.41 ccw(c3789.1,3607.36) 3806,3607.36 ccw(c3822.9,3607.36) U1.6@3810.95,3595.41 ; v1(3802,3637) 3806,3633 U1.6@3806,3569
  Bottom Layer w8: v1(2898,2865) 3342,2865 3438.4,2961.4 ; v1@2904.92,2858.08 cw(c2921.61,2841.39) 2921.61,2865 cw(c2921.61,2888.61) v1@2904.92,2871.92
  Bottom Layer w10: 3438.4,2961.4 3441.4,2964.4 3441.4,2997.45 3501.63,3057.68 3662.25,3057.68 3878,3273.43 3878,3604.57 3845.57,3637 v1(3802,3637) ; v1@3808.21,3630.79 cw(c3823.2,3615.8) 3823.2,3637 cw(c3823.2,3658.2) v1@3808.21,3643.21
CHRG_R: LED2.1 U3.13 | length 781.5
  Top Layer w8: U3.13@2956.55,3144.54 3000.46,3144.54 3032,3113 3032,3019 ; 3033,3018 3033,2618 3120.32,2530.68 LED2.1@3158.76,2530.68 ; LED2.1@3147.91,2523.77 ccw(c3131.21,2507.08) 3131.21,2530.69 ccw(c3131.21,2554.29) LED2.1@3147.91,2537.6
CHRG_STATE: U1.7 U3.5 | length 2031.6
  Top Layer w8: U3.5@2850.28,3085.51 2850.28,3024.51 2860,3014.79 2860,2903 v1(2864,2899) ; v1@2857.08,2905.92 ccw(c2850.05,2912.95) 2860,2912.95 ccw(c2877.95,2912.95) v1@2865.26,2900.26 ; 2860,2932.27 ccw(c2897.27,2932.27) v1@2870.92,2905.92
  Top Layer w10: v1@3747.79,3630.79 cw(c3727.98,3610.98) 3756,3610.98 ; U1.7@3751.05,3595.41 ccw(c3739.1,3607.36) 3756,3607.36 ccw(c3772.9,3607.36) U1.7@3760.95,3595.41 ; U1.7@3756,3569 3756,3627 v1@3757,3628 ; 3756,3620.63 cw(c3770.37,3620.63) v1@3760.21,3630.79
  Bottom Layer w8: v1(2864,2899) 3339,2899 3420.4,2980.4 ; v1@2870.92,2892.08 cw(c2887.61,2875.39) 2887.61,2899 cw(c2887.61,2922.61) v1@2870.92,2905.92
  Bottom Layer w10: 3420.4,2980.4 3421.4,2981.4 3421.4,3005.74 3493.35,3077.68 3653.97,3077.68 3858,3281.72 3858,3558 3822,3594 3765,3594 3754,3605 v1(3754,3637) ; v1@3747.79,3630.79 cw(c3732.8,3615.8) 3754,3615.8 cw(c3775.2,3615.8) v1@3760.21,3630.79
GND: BAT.1 C1.1 C2.1 C4.1 C5.2 C6.1 C8.2 C9.1 C11.1 C12.1 C13.1 C14.1 C16.1 C17.1 C18.2 C19.2 C20.2 C21.1 C22.1 C24.1 C25.2 C26.2 D1.1 D2.2 JiGuang.3 JiGuang.4 LED1.1 LeiDa.2 P1.4 P2.2 Q2.2 Q3.2 Q5.2 R1.1 R4.2 R5.2 R13.1 R17.2 R18.1 R20.1 R34.1 U1.1 U1.3 U1.9 U2.2 U3.16 U3.41 U4.5 U5.1 U6.5 USB1.7 USB1.A12 USB1.B12 Y1.2 Y1.4 | length 10192.7
  Top Layer w8: U3.41@2925.8,3188.59 2928.99,3191.78 3041.22,3191.78 3060,3173 3134,3173 3153.32,3192.32 ; C22.1@3146.65,3203.36 cw(c3140.84,3192.32) 3153.32,3192.32 ; C22.1@3153.32,3217 3153.32,3192.32 ; C22.1@3159.98,3203.36 ccw(c3165.79,3192.32) 3153.32,3192.32
  Top Layer w10: v1@2239.21,3513.79 cw(c2254.2,3498.8) 2254.2,3520 cw(c2254.2,3541.2) v1@2239.21,3526.21 ; 2247.71,3520 cw(c2247.71,3492.05) JiGuang.4@2273.7,3502.32 ; 2256.01,3520 ccw(c2256.01,3551.36) JiGuang.4@2278.94,3529.97 ; JiGuang.4@2264.4,3498.65 ccw(c2233,3486.23) v1(2233,3520) ; JiGuang.4@2271.62,3536.79 cw(c2233,3572.81) v1(2233,3520) ; JiGuang.4@2338.11,3516.49 ccw(c2375.5,3553.88) 2375.5,3501 ; JiGuang.4@2345.18,3523.56 ccw(c2399.64,3578.02) 2399.64,3501 ; JiGuang.4@2352.26,3530.63 ccw(c2423.79,3602.16) 2423.79,3501 ; JiGuang.4@2359.33,3486.31 cw(c2394.79,3450.84) 2394.79,3501 ; JiGuang.4@2359.33,3537.7 ccw(c2447.93,3626.3) 2447.93,3501 ; C16.1@2487.57,3463.73 ccw(c2462.41,3488.89) v1@2498,3488.89 ; v1@2491.79,3507.21 cw(c2476.8,3522.2) 2476.8,3501 cw(c2476.8,3479.8) 2491.79,3494.79 cw(c2476.8,3479.8) 2498,3479.8 cw(c2519.2,3479.8) v1@2504.21,3494.79 ; C16.1@2496,3454.32 2498,3456.32 v1(2498,3501) 2326.92,3501 JiGuang.4@2315.91,3512.01 2307.92,3520 v1(2233,3520) ; 2498,3483.99 ccw(c2526.66,3483.99) C16.1@2506.39,3463.73 ; Y1.4@2578.56,3467.55 2589.45,3467.55 2656.38,3400.62 Y1.2@2665.18,3400.62 ; Y1.4@2582.49,3448.93 cw(c2582.49,3387.16) 2626.16,3430.84 ; Y1.4@2582.49,3458.93 cw(c2582.49,3421.31) 2609.09,3447.91 ; Y1.4@2601.12,3467.55 ccw(c2629.27,3467.55) 2609.36,3447.64 ; 2621.16,3435.84 ccw(c2661.24,3475.92) Y1.2@2661.24,3419.24 ; 2632.88,3424.12 cw(c2609.38,3400.62) Y1.2@2642.62,3400.62 ; Y1.2@2638.23,3418.77 ccw(c2661.24,3441.78) Y1.2@2661.24,3409.24 ; U4.5@2680.2,3611.52 2953.25,3611.52 C20.2@2968.9,3595.86 2982.86,3595.86 3034,3647 3302,3647 3311.14,3656.14 ; U4.5@2684.46,3607.26 cw(c2694.74,3596.97) 2694.74,3611.52 cw(c2694.74,3626.06) U4.5@2684.46,3615.77 ; 2886.15,3611.52 cw(c2886.15,3513.12) C20.2@2955.73,3582.69 ; 2910.3,3611.52 cw(c2910.3,3537.26) C20.2@2962.8,3589.77 ; 2934.44,3611.52 cw(c2934.44,3561.4) C20.2@2969.87,3596.84 ; R18.1@3412.31,2566 3413.31,2565 3517,2565 3562,2610 R5.2@3562,2674.68 3632,2674.68 R4.2@3634,2672.68 ; R18.1@3421.72,2555.61 cw(c3444.4,2532.93) 3444.4,2565 ; R18.1@3421.72,2574.43 ccw(c3444.48,2597.18) 3444.48,2565 ; 3530.23,2578.23 cw(c3564,2544.47) v1@3564,2592.22 ; 3547.31,2595.31 cw(c3564,2578.61) v1@3564,2602.22 ; R5.2@3552.59,2665.27 cw(c3529.87,2642.56) 3562,2642.56 cw(c3594.13,2642.56) R5.2@3571.41,2665.27 ; v1@3557.79,2607.21 ccw(c3547.63,2617.37) 3562,2617.37 ; 3562,2627.02 ccw(c3590.02,2627.02) v1@3570.21,2607.21 ; R5.2@3572.39,2665.27 cw(c3595.11,2642.56) 3595.11,2674.68 cw(c3595.11,2706.81) R5.2@3572.39,2684.09 ; 3596.06,2674.68 cw(c3596.06,2635.73) R4.2@3623.61,2663.27 ; 3605.72,2674.68 ccw(c3605.72,2699.98) R4.2@3623.61,2682.09
  Top Layer w15: C16.1@2496,3454.32 2565.32,3454.32 Y1.4@2578.56,3467.55 ; C16.1@2503.75,3454.32 ccw(c2503.75,3538.41) Y1.4@2563.22,3478.95 ; C16.1@2504.63,3446.67 cw(c2523.07,3428.23) 2523.07,3454.32 cw(c2523.07,3480.41) C16.1@2504.63,3461.96 ; 2539.97,3454.32 ccw(c2539.97,3502.2) Y1.4@2573.83,3468.34 ; Y1.2@2665.18,3400.62 2739.07,3400.62 C17.1@2741,3398.68 ; Y1.2@2680.51,3389.22 cw(c2708.03,3361.7) 2708.03,3400.62 cw(c2708.03,3439.54) Y1.2@2680.51,3412.02 ; 2709.26,3400.62 cw(c2709.26,3367.93) C17.1@2732.37,3391.04 ; 2718.59,3400.62 ccw(c2718.59,3420.11) C17.1@2732.37,3406.33 ; C25.2@3508.96,3280 C25.2@3508.96,3287 ; D1.1@3673.25,3081 D1.1@3674.62,3082.37
  Top Layer w20: C22.1@3141.62,3217.98 cw(c3169.72,3217.98) 3149.85,3237.85 ; 3153.32,3243.32 3155.32,3243.32 3218,3306 3261,3306 3273,3294 3273,2961 ; C4.1@3158,2951.96 3264.96,2951.96 3274,2961 ; C22.1@3161.62,3217.98 cw(c3238.01,3217.98) 3184,3272 ; 3173.18,2942.88 cw(c3195.09,2920.97) 3195.09,2951.96 cw(c3195.09,2982.95) C4.1@3173.18,2961.04 ; 3244.36,2820.2 3255.16,2831 3323,2831 ; 3274,3057 3276,3055 ; 3276.33,3055.33 U2.2@3317.17,3055.33 ; U6.5@3294.2,3573.52 3294.2,3639.2 3302,3647 ; 3311.14,3656.14 3344,3689 R34.1@3389.69,3689 ; 3327.23,3672.23 ccw(c3293.47,3706) v1@3341.22,3706 ; 3332.6,3695.55 ccw(c3346.68,3707.41) 3346.68,3689 ; v1@3347.89,3708.44 ccw(c3389.68,3743.65) R34.1@3389.68,3689 ; 3357.52,3689 cw(c3357.52,3651.82) R34.1@3383.81,3678.11 ; Q5.2@3376.93,3638.71 ccw(c3346.12,3669.52) R34.1@3389.69,3669.52 ; Q5.2@3379.24,3639.8 ccw(c3378.14,3651.3) 3389.69,3651.3 ; Q5.2@3379.6,3629.21 3379.6,3641.21 3389.69,3651.3 ; Q5.2@3383.38,3636.04 cw(c3404.91,3636.07) 3389.69,3651.3 ; R34.1@3383.81,3676.14 cw(c3369.63,3661.96) 3389.69,3661.96 cw(c3409.74,3661.96) R34.1@3395.56,3676.14 ; C25.2@3508.96,3287 3508.96,3256.04 ; C25.2@3520.48,3275.23 ccw(c3549.23,3261.09) 3526.57,3238.43 ; 3546.61,3829.3 ccw(c3584,3829.3) C24.1@3557.56,3802.86 ; LeiDa.2@3546.61,3929.98 3546.61,3801.08 C24.1@3551.68,3796 ; D1.1@3664.99,3072.74 ccw(c3641.74,3049.48) 3641.74,3082.37 ccw(c3641.74,3115.26) D1.1@3664.99,3092 ; D1.1@3674.62,3082.37 3582.37,3082.37 3581,3081 3539,3123 3539,3226 3508.96,3256.04 ; R1.1@3694.81,3266.86 ccw(c3667.8,3293.87) 3706,3293.87 ; R1.1@3695.82,3267.72 ccw(c3681.44,3287.63) 3706,3287.63 ; 3700.37,3282 3706,3287.63 ; U1.1@3706,3372 U1.1@3706,3349 ; 3706,3419 U1.1@3706,3349 ; U1.9@3761.39,3429.67 cw(c3705.59,3346.2) U1.3@3806,3346.2 ; U1.9@3772.51,3446.3 cw(c3730.61,3383.63) 3806,3383.63 ; U1.9@3781,3459 3806,3434 U1.3@3806,3349 ; U1.9@3783.63,3462.93 cw(c3755.63,3421.06) U1.9@3806,3421.06 ; C6.1@3903.44,3268.86 ccw(c3889.26,3283.04) 3909.32,3283.04 ccw(c3929.37,3283.04) C6.1@3915.19,3268.86 ; C6.1@3909.32,3262 3909.32,3416.32 ; C1.1@3952.32,3084 4059.78,3084 4061.78,3082 ; C1.1@3958.19,3078.13 cw(c3972.37,3063.94) 3972.37,3084 cw(c3972.37,3104.06) C1.1@3958.19,3089.87 ; 3389.69,3651.3 R34.1@3389.69,3689 ; 3508.96,3256.04 cw(c3526.61,3256.04) 3516.39,3270.43 ccw(c3526.61,3256.04) 3508.96,3256.04 ; 3508.96,3256.04 ccw(c3491.31,3256.04) 3501.53,3270.43 cw(c3491.31,3256.04) 3508.96,3256.04 ; 3706,3287.63 U1.1@3706,3349
  Top Layer w23.62: C22.1@3153.32,3217 3153.32,3243.32 ; U2.2@3328.98,3055.33 ccw(c3328.98,3109.49) 3367.28,3071.19 ; 3351.42,3055.33 3376.4,3080.32 C2.1@3387,3080.32 ; Q2.2@3419.6,2747.21 3419.6,2814.91 R13.1@3425.69,2821 ; 3419.6,2789.64 cw(c3456.07,2789.64) R13.1@3430.28,2815.42 ; D1.1@3674.3,3098.11 ccw(c3673.67,3121.43) 3697,3121.43 3697,3227 ; D1.1@3674.62,3082.37 3697,3104.75 3697,3227 ; 3697,3234.43 cw(c3725.27,3234.43) R1.1@3705.28,3254.42 ; R1.1@3697,3265 3697,3227 ; D1.1@3666.27,3094.66 ccw(c3592.08,3168.85) 3697,3168.85 cw(c3592.08,3168.85) D1.1@3666.27,3094.66 ; D1.1@3682.97,3077.96 ccw(c3649.11,3111.82) 3697,3111.82 cw(c3649.11,3111.82) D1.1@3682.97,3077.96
  Top Layer w27.56: U2.2@3317.17,3055.33 3351.42,3055.33 ; Q5.2@3377.6,3639.21 Q5.2@3382.69,3644.3 ; C24.1@3534.68,3796 C24.1@3534.68,3803.68 ; U5.1@3539,3652.91 C24.1@3539,3794 ; 3539,3665.58 cw(c3598.28,3665.58) C26.2@3556.36,3707.49 ; 3539,3753.46 cw(c3593.24,3753.46) C24.1@3554.89,3791.81 ; 3539,3774.42 ccw(c3598.28,3774.42) C26.2@3556.36,3732.51 ; D1.1@3674.62,3068.59 cw(c3674.62,3003.92) 3720.35,3049.65 ; D1.1@3674.62,3082.37 3687.63,3082.37 3763,3007 v1(3826.6,3007) 3836.7,2996.89 USB1.B12@3945.08,2860.76 ; U1.9@3803.27,3436.73 cw(c3864.28,3375.72) 3864.28,3462 ; U1.9@3803.27,3481.27 ccw(c3849.8,3527.8) 3849.8,3462 ; U1.9@3812,3462 3945,3462 ; 4061.78,3368.22 4061.78,3082 4061.78,3055.42 USB1.A12@4114.89,2988.72
  Top Layer w39.37: 3693.03,3704.83 cw(c3700.29,3661.29) 3731.5,3692.5 ; v1@3697.18,3762.82 ccw(c3651.73,3808.27) 3716,3808.27 ; v1@3697.18,3771.18 cw(c3651.73,3725.73) 3716,3725.73 ; 3698.18,3694.82 ccw(c3655.14,3737.86) 3716,3737.86 ; 3716,3702.8 cw(c3763.2,3702.8) v1@3729.82,3736.18 ; 3716,3740.93 ccw(c3793.93,3740.93) v1@3738.82,3685.82 ; 3716,3761.2 ccw(c3763.2,3761.2) v1@3729.82,3727.82 ; 3722,3702 3716,3708 3716,3882 3777,3821 3984,3821 4013.9,3791.1 BAT.1@4013.9,3734.81
  Bottom Layer w10: v1@2226.79,3526.21 ccw(c2211.8,3541.2) 2233,3541.2 ccw(c2254.2,3541.2) v1@2239.21,3526.21 ; v1(2233,3520) 2233,3593 2237,3597
  Bottom Layer w15: 2237,4006 2237,3963 2237,3597 2256,3578 2295.43,3578 Q3.2@2306.12,3588.69 2309.69,3585.12 R20.1@2309.69,3526 ; 2292.23,3578 ccw(c2292.23,3593.33) Q3.2@2303.07,3582.49 ; R20.1@2302.04,3534.63 ccw(c2283.6,3553.07) 2309.69,3553.07 ccw(c2335.78,3553.07) R20.1@2317.33,3534.63 ; Q3.2@2303.07,3576.39 cw(c2287.1,3560.42) 2309.69,3560.42
  Bottom Layer w20: 2237,3963 2251,3977 C8.2@2290.69,3977
  other v1: 2860,2470 2947,2471 3053,2474 3326,2488 3465,2504 3575,2534 2986,2543 2895,2549 3704,2571 3564,2601 2190,2608.82 2268.74,2608.82 2347.48,2608.82 2426.22,2608.82 2504.96,2608.82 2583.7,2608.82 2905,2621 2965,2623 3713,2645 3919,2664 2283.46,2677.17 2935,2687 2190,2687.56 2877,2704 2979,2727 2283.46,2755.91 3835,2760 2190,2766.3 3535,2827 2190,2845.04 2285,2845.04 2807,2867 2598.43,2913.39 2677.17,2913.39 2755.91,2913.39 2190,2923.78 2285,2923.78 3477,2958 3815,2966 2682,2969 2440.94,2992.13 2190,3002.52 2285,3002.52 2440.94,3070.87 2190,3081.26 2285,3081.26 3104,3112 4016,3128 2811,3133 2858,3133 2903,3133 3292,3138 3241,3141 2190,3160 2239,3160 2285,3160 2330,3160 2375,3160 2424,3160 2472,3160 2518,3160 2568,3160 2619,3160 2661,3160 3114,3160 4061.78,3162 3273,3180 2903,3182 2856.15,3183.91 2811,3185 3528,3186 2903,3231 2857,3232 2812,3233 2676,3250 2494,3251 2538,3251 2622,3251 2361,3254 2407,3254 2278,3255 2236,3256 3455,3266 3639,3276 2192,3282 2319,3284 3278,3298 3667,3313 4013.9,3341.11 2192,3360.74 2707,3372 3695,3410 3741,3413 4013.9,3419.85 2192,3439.48 3695,3449 3739,3449 3738,3483 3695,3484 4013.9,3498.59 2535,3506 3361,3509 2192,3518.22 3036,3540 3370,3559 3467,3561 3084,3572 4013.9,3577.33 3022,3593 2192,3596.96 3544,3610 3498,3611 3065,3636 4013.9,3656.07 3136,3658 3180,3658 2192,3675.7 3687,3686 3744,3686 3065,3699 3134,3702 3183,3702 3345,3706 3685,3727 3740,3728 2522,3736 2565,3736 2192,3754.44 3701,3762 2487,3763 3065,3771 2453,3787 3510,3832 2192,3833.18 3561,3850 4068,3862 3346,3876 3827,3889 3372,3906 2192,3911.92 3777,3945 3776,4020 4065,4081 3777,4090
  other v2: 3547,3218 3367,3254 3546,4091
JIGUANG_CON: R19.2 U3.32 | length 710.4
  Top Layer w8: v1@2310,3396.22 cw(c2310,3372.61) 2326.69,3389.31 cw(c2343.39,3406) v1@2319.78,3406 ; v1(2310,3406) 2393,3323 2436,3323 2474,3285 2694.29,3285 2739.51,3239.78 2759,3239.78 U3.32@2759.75,3239.03
  Bottom Layer w8: R19.2@2298.57,3441.9 cw(c2270.97,3414.3) v1@2310,3414.3 ; v1@2303.08,3412.92 ccw(c2286.39,3429.61) 2310,3429.61 ccw(c2333.61,3429.61) v1@2316.92,3412.92 ; R19.2@2304.22,3447.56 cw(c2290.28,3433.61) 2310,3433.61 ; R19.2@2308.68,3453 2310,3451.68 v1(2310,3406) ; 2310,3420.65 cw(c2340.05,3420.65) R19.2@2318.8,3441.9
LED_B: R8.2 U3.9 | length 714.5
  Top Layer w8: R8.2@2635.88,2714.43 ccw(c2611.46,2738.86) 2646,2738.86 ccw(c2680.54,2738.86) R8.2@2656.12,2714.43 ; R8.2@2646,2704.32 2646,2759 2679,2792 2923,2792 2944,2813 2944,3008.79 2913.27,3039.52 U3.9@2913.27,3085.51
LED_G: R11.2 U3.10 | length 672.2
  Top Layer w8: R11.2@2707.88,2713.43 ccw(c2683.46,2737.86) 2718,2737.86 ccw(c2752.54,2737.86) R11.2@2728.12,2713.43 ; R11.2@2718,2703.32 2718,2757 2737,2776 2945,2776 2961,2792 2961,3013 2929.02,3044.98 U3.10@2929.02,3085.51